# Altium PCB eink_r1.PcbDoc
Units mil, origin at the board's own origin, x right, y up, seen from the top; angles counter-clockwise.
Board outline 1896 x 1576.33 mil, 2 copper layers (Top Layer, Bottom Layer); 38 components, 24 nets, 136 pads, 126 vias.
Unrouted connection lines stored in the file: 2.
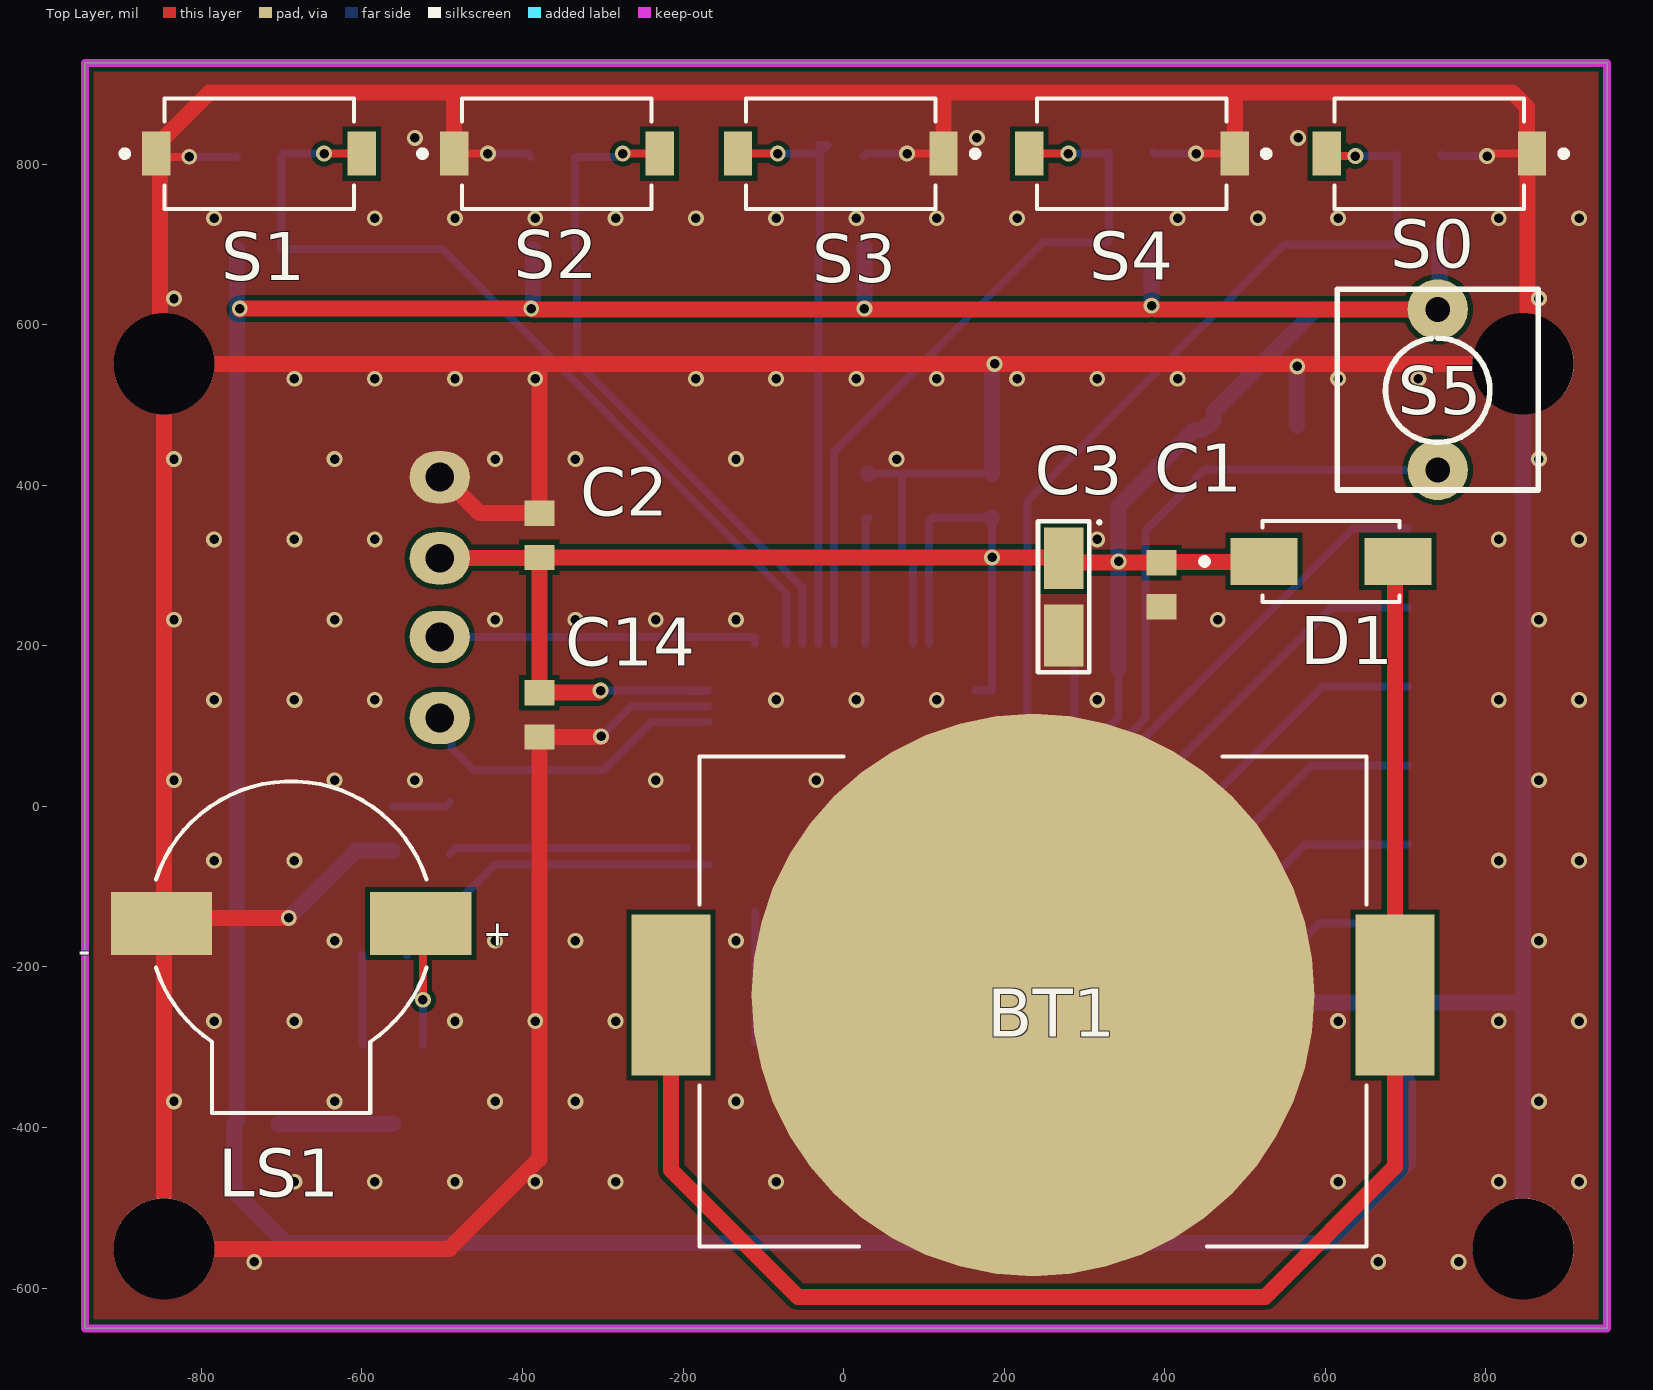
[diagram p0: Top Layer view]
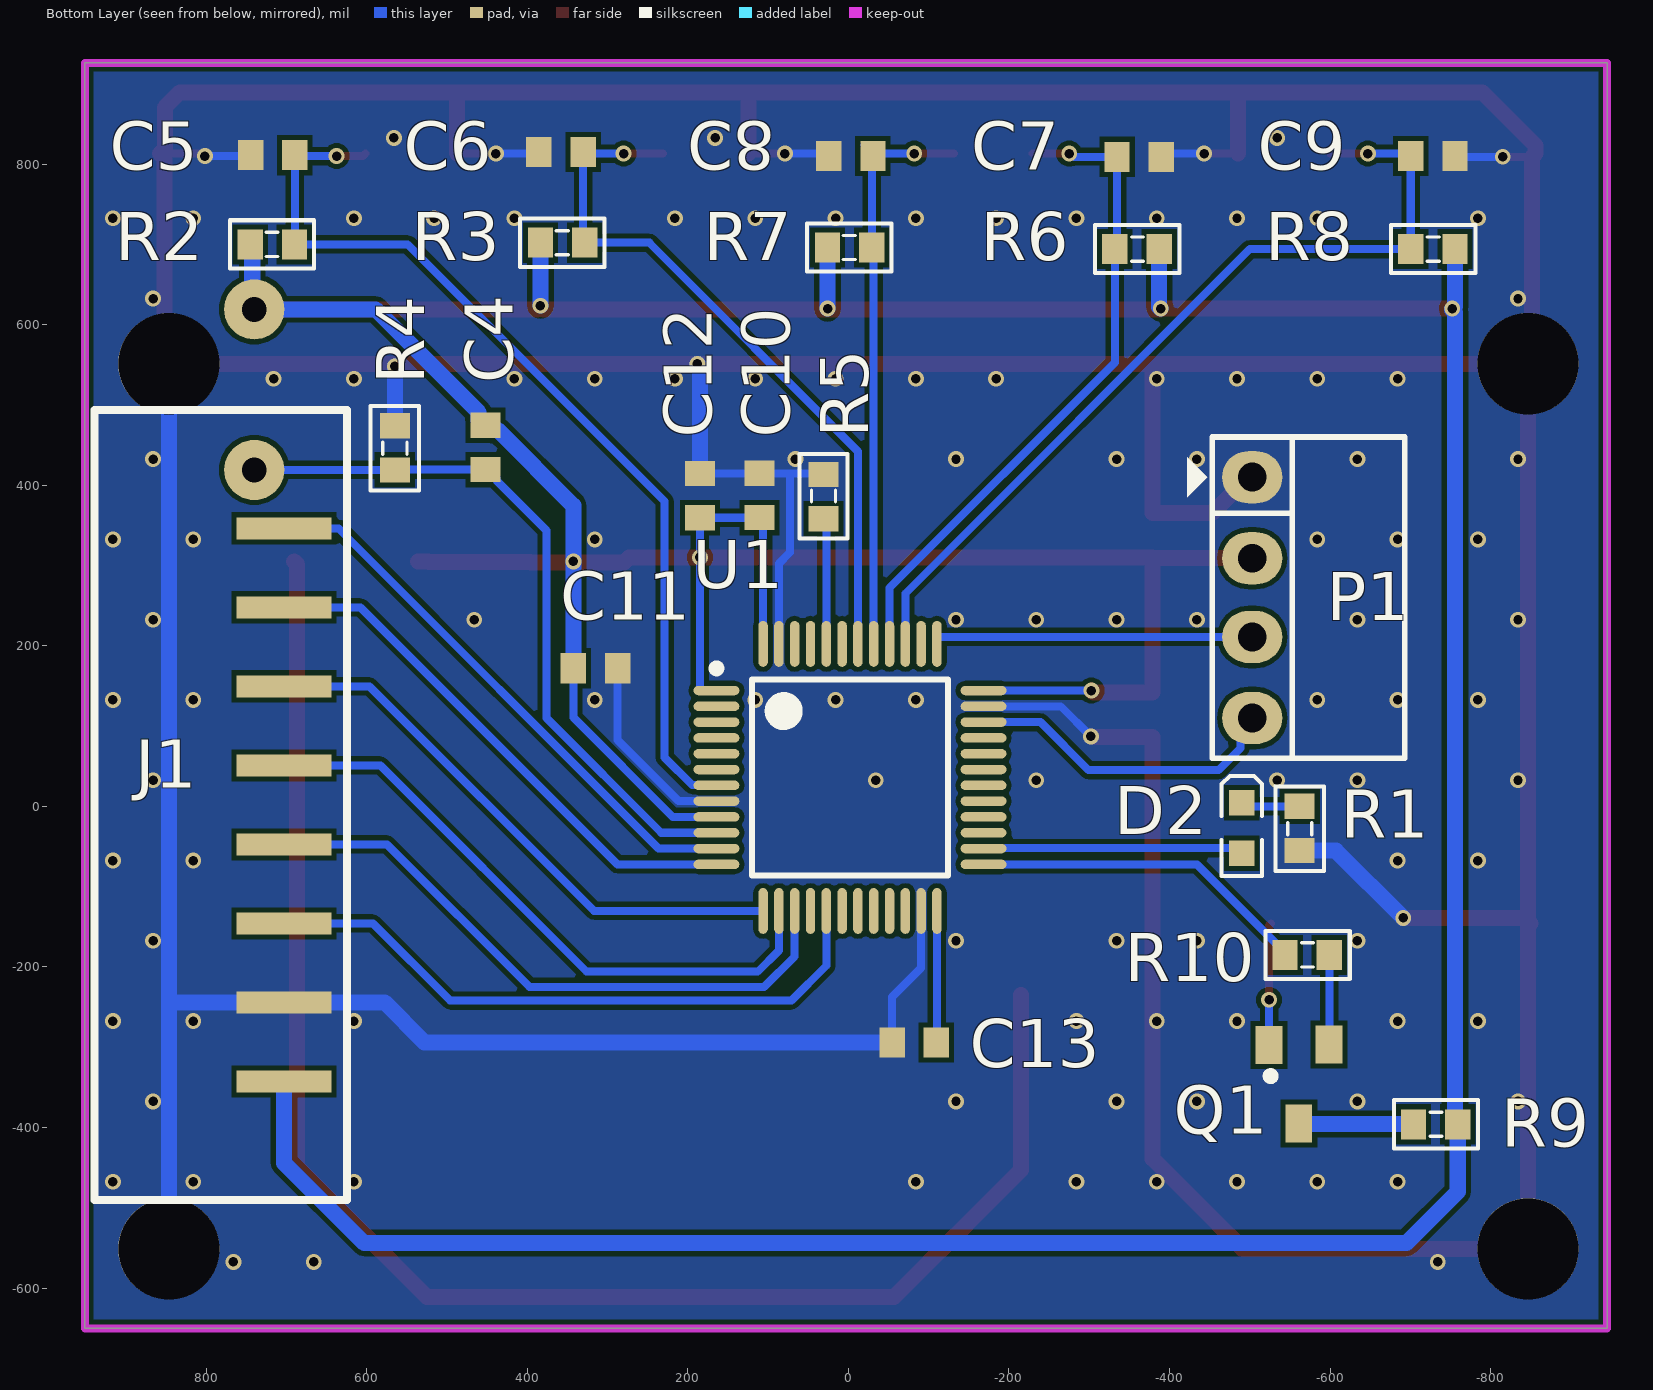
[diagram p1: Bottom Layer view, seen from below]
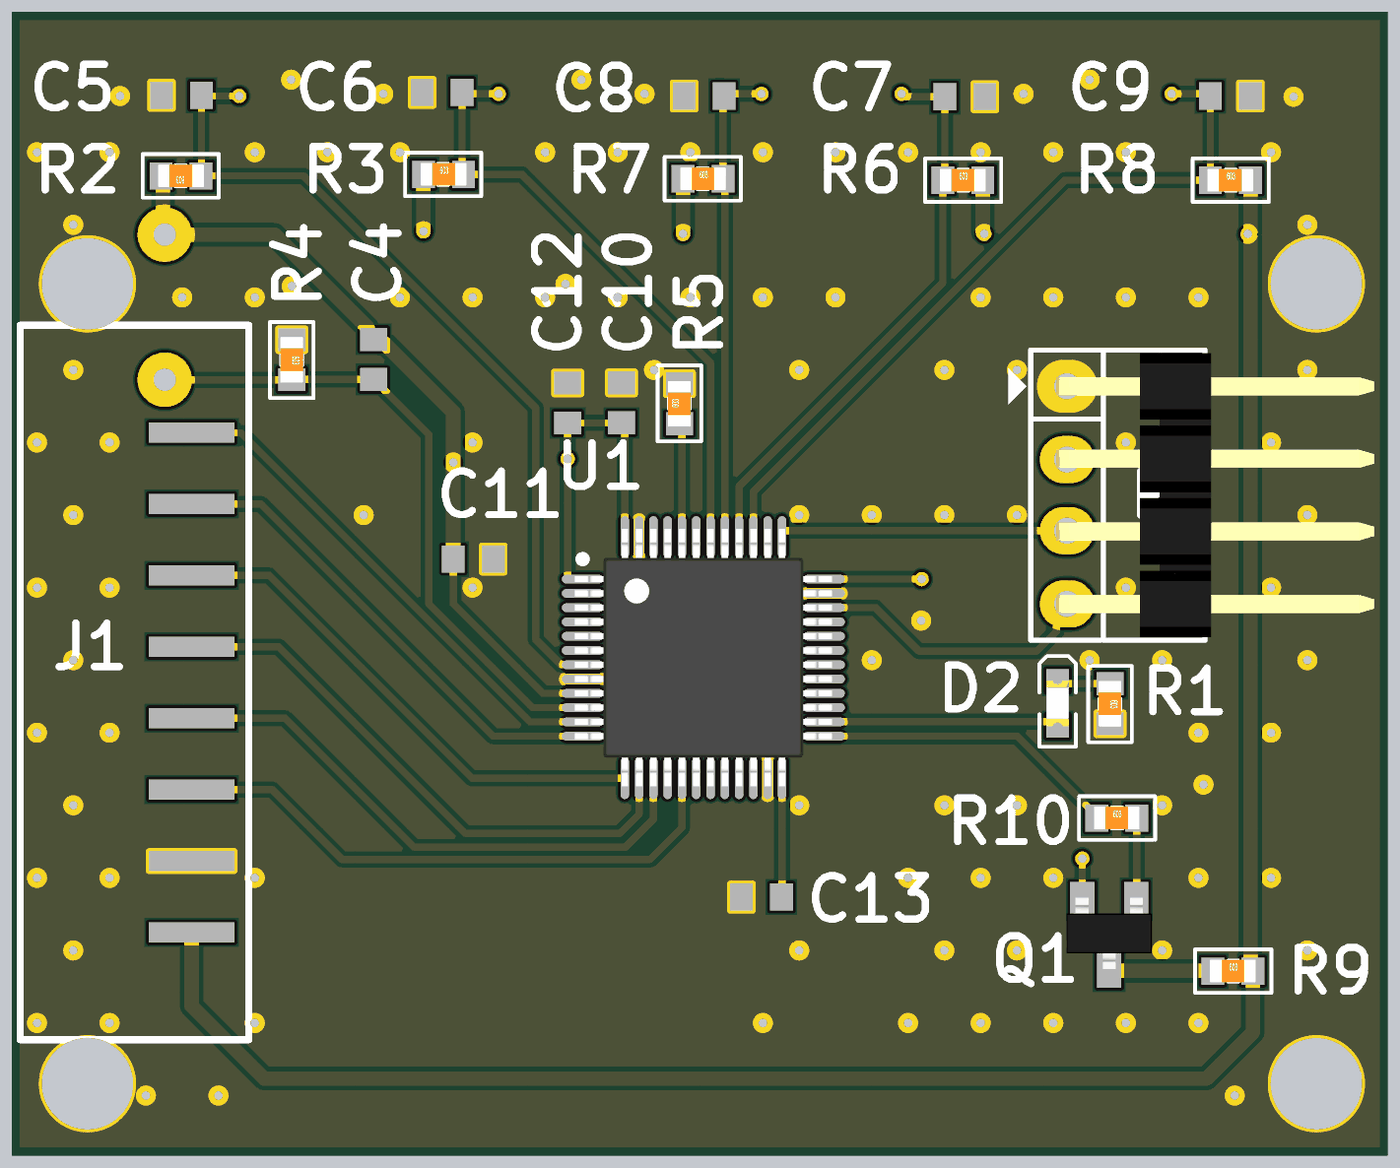
[diagram p2: 3D render of the assembled board from below, using the file's embedded part models]

## Layer stack, top to bottom
Top Solder: solder mask 0.4, Solder Resist, Dk 3.5
Top Layer: signal copper 1.4
Dielectric 1: dielectric 12.6, FR-4, Dk 4.8
Bottom Layer: signal copper 1.4
Bottom Solder: solder mask 0.4, Solder Resist, Dk 3.5

## Board outline
-945,-650.33 -945,926 951,926 951,-650.33

## Design rules (kind name [scope] priority, off if disabled: settings)
Clearance [All] p1: gap=6 ignorepadtopadclearanceinfootprint=FALSE except(0: Arc-Hole Track-Hole SMDPad-Hole THPad-Hole Via-Hole Fill-Hole Poly-Hole Region-Hole Text-Hole)
PlaneConnect [All] p1: planeconnectstyle=Direct reliefexpansion=20 reliefentries=4 reliefconductorwidth=10 reliefairgap=10
PolygonConnect [All] p1: connectstyle=Direct reliefconductorwidth=10 reliefentries=4 polygonreliefangle="90 Angle" airgapwidth=10
RoutingVias [All] p1: holewidth=11.81 width=19.68 viastyle="Through Hole" minholewidth=11.81 minwidth=19.68 maxholewidth=11.81 maxwidth=19.68
SolderMaskExpansion [All] p1: expansion=4 istentingtop=FALSE
Width [All] p1: maxlimit=30 minlimit=10 preferedwidth=20
29 further rules are at their usual default settings.

## Classes and differential pairs
component class eink_r1: BT1 C1 C2 C3 C4 C5 C6 C7 C8 C9 C10 C11 C12 C13 D1 D2 J1 K1 LS1 P1 Q1 R1 R2 R3 R4 R5 R6 R7 R8 R9 R10 S0 S2 S4 S5 U1

## Components (designator, comment, footprint, x,y, rotation, side; value= is the part's Value field where it differs from the comment)
BT1 "BAT-HLD-001" BAT_BAT-HLD-001 236,-235 r0 top
C1 "Cap Non-Pol SMD" CAP-SM-0603 396,276 r90 top value=104
C2 "Cap Non-Pol SMD" CAP-SM-0603 -379,337.56 r270 top value=104
C3 "Tantalum Capacitor" CAPMP3216X18N 274,261 r270 top value=1uF
C4 "Cap Non-Pol SMD" CAP-SM-0603 452,447 r90 bottom value=105
C5 "Cap Non-Pol SMD" CAP-SM-0603 717,811 r180 bottom value=105
C6 "Cap Non-Pol SMD" CAP-SM-0603 358,815 r180 bottom value=105
C7 "Cap Non-Pol SMD" CAP-SM-0603 -362.19,809 r0 bottom value=105
C8 "Cap Non-Pol SMD" CAP-SM-0603 -3,810 r180 bottom value=105
C9 "Cap Non-Pol SMD" CAP-SM-0603 -728,810 r0 bottom value=105
C10 "Cap Non-Pol SMD" CAP-SM-0603 110.68,387.19 r270 bottom value=104
C11 "Cap Non-Pol SMD" CAP-SM-0603 315,172 r0 bottom value=104
C12 "Cap Non-Pol SMD" CAP-SM-0603 185,387 r270 bottom value=104
C13 "Cap Non-Pol SMD" CAP-SM-0603 -82,-294 r180 bottom value=104
C14 "Cap Non-Pol SMD" CAP-SM-0603 -379,114 r90 top value=104
D1 "SS14" DIOM4325X250N 607,305 r0 top
D2 "LED SMD" LED_0603_Blue -490,-27 r90 bottom
J1 "Header" PCBComponent_1 703,1.79 r270 bottom
LS1 "CMT-0926-86-SMT-TR" XDCR_CMT-0926-86-SMT-TR -688,-146 r180 top
P1 "Header 4H" JP4H -503,410 r270 bottom
Q1 "C1815" SOT23B -561,-346 r0 bottom
R1 "RESISTOR SMD" RES-SM-0603 -562.13,-0.5 r270 bottom value=560
R2 "RESISTOR SMD" RES-SM-0603 690.56,700 r0 bottom value=10K
R3 "RESISTOR SMD" RES-SM-0603 329,702 r0 bottom value=10K
R4 "RESISTOR SMD" RES-SM-0603 565,473.56 r270 bottom value=10K
R5 "RESISTOR SMD" RES-SM-0603 31,358.88 r90 bottom value=10K
R6 "RESISTOR SMD" RES-SM-0603 -332.44,694 r180 bottom value=10K
R7 "RESISTOR SMD" RES-SM-0603 -28.56,696 r0 bottom value=10K
R8 "RESISTOR SMD" RES-SM-0603 -701,694 r180 bottom value=10K
R9 "RESISTOR SMD" RES-SM-0603 -704.44,-396 r180 bottom value=100
R10 "RESISTOR SMD" RES-SM-0603 -544.44,-185 r180 bottom value=1K
S0 "PTS636_SM43J_SMTR_LFS" SW_PTS636_SM43J_SMTR_LFS 729.5,813 r180 top (schematic designator S2)
S1 "PTS636_SM43J_SMTR_LFS" SW_PTS636_SM43J_SMTR_LFS -727.95,813 r0 top (schematic designator S6)
S2 "PTS636_SM43J_SMTR_LFS" SW_PTS636_SM43J_SMTR_LFS -357.21,813 r0 top (schematic designator S4)
S3 "PTS636_SM43J_SMTR_LFS" SW_PTS636_SM43J_SMTR_LFS -3.54,813 r180 top (schematic designator S5)
S4 "PTS636_SM43J_SMTR_LFS" SW_PTS636_SM43J_SMTR_LFS 359,813 r180 top (schematic designator S3)
S5 "Tact SW - 2Pin" SW2 740,419 r90 top (schematic designator S1)
U1 "STM32F103C8T6" TSQFP50P900X900X160-48N -2,36 r180 bottom

## Footprints (in the part's own frame and the unit in brackets; to place one, negate y for a bottom-side part, rotate by r counter-clockwise, add the part's x,y. Pads: shape width x height; smd on the part's side, far side on the other; paste and mask are expansions set on the pad)
BAT_BAT-HLD-001 [mm]
  round 17.8 smd paste-10: N1(0,0)
  rect 2.5x5.1 smd: P1(-11.45,0) P2(11.45,0)
  silkscreen extent -10.55,-7.95 10.55,7.55
CAP-SM-0603 [mm] "SMD Ceramic Capacitor Size 0603"
  rect 0.8x0.95 smd: 1(-0.7,0) 2(0.7,0)
  body extent -0.85,-0.45 0.85,0.45, height 0.6
CAPMP3216X18N [mm] "Molded Capacitor, 2-Leads, Body 3.20x1.60mm, IPC Medium Density"
  rect 1.95x1.25 smd: 1(-1.225,0) 2(1.225,0)
  silkscreen extent -2.41,-0.81 2.39,1.18, body extent -1.92,-0.9 1.92,0.9, height 1.8
DIOM4325X250N [mm]
  rect 2.12x1.5 smd: A(2.115,0) C(-2.115,0)
  silkscreen extent -4.1,-1.28 2.16,1.28
JP4H [mil]
  oval 65x75 hole 36: 1(0,0) 2(101,0) 3(199,0) 4(300,0)
  silkscreen extent -50,-81 350,190, body extent -46,-15 346,424, height 99
LED_0603_Blue [mm] "Chip LED, 2-Leads, Body 1.6x0.8mm, IPC Medium Density"
  rect 0.8x0.8 smd: 1(-0.8,0) 2(0.8,0)
  silkscreen extent -1.52,-0.64 1.65,0.64, body extent -0.8,-0.4 0.8,0.4, height 0.7
PCBComponent_1 [mm]
  rect 0.7x3 smd: 1(-8.75,0) 2(-6.25,0) 3(-3.75,0) 4(-1.25,0) 5(1.25,0) 6(3.75,0) 7(6.25,0) 8(8.75,0)
  silkscreen extent -12.5,-6 12.5,2
RES-SM-0603 [mm]
  rect 0.8x0.95 smd: 1(-0.014,0) 2(1.386,0)
  silkscreen extent -0.64,-0.76 2.03,0.76, body extent -0.11,-0.4 1.49,0.4, height 0.3
SOT23B [mm] "SOT 23B"
  rect 0.85x1.2 smd: 1(0.94,-1.245) 2(0,1.25) 3(-0.95,-1.25)
  silkscreen extent 0.77,-0.38 1.02,-0.13, body extent -1.5,-1.3 1.5,1.2, height 1.06
SW2 [mil] "SW button 2pin, 250x 250 mil"
  round 75 hole 31: 1(0,0) 2(200,0)
  silkscreen extent -25,-125 225,125
SW_PTS636_SM43J_SMTR_LFS [mm]
  rect 0.9x1.4 smd: 1(-3.25,0) 2(3.25,0)
  silkscreen extent -4.35,-1.75 3,1.75
TSQFP50P900X900X160-48N [mm] "TSQFP, 48-Leads, Body 7.00x7.00mm, Pitch 0.50mm, IPC Medium Density"
  oval 1.45x0.3 smd: 1(-4.225,2.75) 2(-4.225,2.25) 3(-4.225,1.75) 4(-4.225,1.25) 5(-4.225,0.75) 6(-4.225,0.25) 7(-4.225,-0.25) 8(-4.225,-0.75) 9(-4.225,-1.25) 10(-4.225,-1.75) 11(-4.225,-2.25) 12(-4.225,-2.75) 25(4.225,-2.75) 26(4.225,-2.25) 27(4.225,-1.75) 28(4.225,-1.25) 29(4.225,-0.75) 30(4.225,-0.25) 31(4.225,0.25) 32(4.225,0.75) 33(4.225,1.25) 34(4.225,1.75) 35(4.225,2.25) 36(4.225,2.75)
  oval 0.3x1.45 smd: 13(-2.75,-4.225) 14(-2.25,-4.225) 15(-1.75,-4.225) 16(-1.25,-4.225) 17(-0.75,-4.225) 18(-0.25,-4.225) 19(0.25,-4.225) 20(0.75,-4.225) 21(1.25,-4.225) 22(1.75,-4.225) 23(2.25,-4.225) 24(2.75,-4.225) 37(2.75,4.225) 38(2.25,4.225) 39(1.75,4.225) 40(1.25,4.225) 41(0.75,4.225) 42(0.25,4.225) 43(-0.25,4.225) 44(-0.75,4.225) 45(-1.25,4.225) 46(-1.75,4.225) 47(-2.25,4.225) 48(-2.75,4.225)
  silkscreen extent -4.35,-3.1 3.1,3.57, body extent -4.5,-4.5 4.5,4.5, height 1.6
XDCR_CMT-0926-86-SMT-TR [mm]
  rect 3.2x2 smd: N(4.1,0) P(-4.1,0)
  silkscreen extent -4.28,-4.5 4.28,6

## Part data
BT1: "Battery Retainer Coin, 20.0mm 1 Cell SMD (SMT) Tab", Package=None, Availability=Unavailable, MP=BAT-HLD-001, Price=None
C1 C2 C4 C5 C6 C7 C8 C9 C10 C11 C12 C13 C14: "Capacitor"
D1 LS1: Package=None, Availability=Unavailable, Price=None
  D1: MP=SS14
  LS1: MP=CMT-0926-86-SMT-TR
D2: "LED"
J1: "XH 2.54mm PCB Header 8 Pin SMD Horizontal"
P1: "Header, 4-Pin, Right Angle", LatestRevisionDate=17-Jul-2002, LatestRevisionNote="Re-released for DXP Platform.", Publisher="Altium Limited"
Q1: "NPN Bipolar Transistor"
R1 R2 R3 R4 R5 R6 R7 R8 R9 R10: "Resistor"
S0 S1 S2 S3 S4: "Tactile Switch SPST-NO Top Actuated Surface Mount", Package=None, Availability=Unavailable, MP=PTS636_SM43J_SMTR_LFS, Price=None
S5: "Switch button 2 pin"
U1: Manufacturer=ST, ComponentLink1Description="Supplier 1 Link"

## Free pads (board coordinates)
  round 125.98 hole 125.98: 1(-846.46,-551.18) 1(-846.46,551.18) 1(846.46,-551.18) 1(846.46,551.18)

## Via types
v1: diameter 19.68, hole 11.81, Top Layer to Bottom Layer, 126 vias

## Nets (pads, with @x,y where several pads share a name; then routed paths per layer and width w, separated by ;. In a path a pad name is that pad's centre, name@x,y a point inside that pad or via, vN(x,y) a via of type N, cw(c..) or ccw(c..) an arc to the next point about the centre after c; other vN are vias at no path point)
3V3: C1.2 C2.2 C3.1 C4.2 C10.2 C11.2 C12.2 C13.2 C14.2 D1.C J1.8 P1.2 R2.2 R3.2 R6.2 R7.2 R8.2 R9.2 S5.2 U1.1 U1.9 U1.24 U1.36 U1.48 | length 7704
  Top Layer w10: C14.2 C14.2@-376.29,144.27
  Top Layer w20: v1@-752,619 -751,620 v1(-389,620) -388,619 379,619 v1(383.56,623.56) 388.12,619 S5.2 S5.2@743,616 ; P1.2 -502.5,309.5 -379.5,309.5 C2.2 ; v1(-302.73,144.27) -305.44,141.56 C14.2 C2.2 ; D1.C@535.94,305 D1.C 523.01,304.28 396.72,304.28 C1.2 279.67,303.56 C3.1 273.23,310 v1(185,310) C2.2
  Bottom Layer w10: v1(-302.73,144.27) U1.36 ; U1.36@-192.08,143.65 -191.81,143.92 -169.22,143.92 U1.36@-168.95,143.65 ; U1.24 -110.27,-293.29 C13.2 ; U1.48 106.27,355.02 C10.2@110.78,359.54 ; C10.2 C10.2@110.78,359.54 ; U1.9 218.79,-13.21 342.56,110.56 C11.2 ; U1.1 184.16,144.27 185,145.1 v1(185,310) C12.2 110.88,359.44 C10.2@110.78,359.54
  Bottom Layer w20: R8.2 -755.56,622.56 -752,619 -755.56,615.44 -755.56,-392.56 R9.2 -759,-480 -695,-544 603,-544 703,-444 J1.8 ; v1(-389,620) -387,622 R6.2 ; v1(26,620) R7.2 ; C12.2@184.9,359.54 C12.2 ; C11.2 v1(342.56,305) 342.56,374.56 436.81,468.81 446.25,468.81 C4.2 454.95,474.56 460.7,480.31 460.7,490.7 589,619 S5.2 742.56,621.56 742.56,697.44 R2.2 ; v1(383.56,623.56) R3.2
  other v1: -752,620
BUSY: J1.1 U1.11 | length 703.9
  Bottom Layer w10: U1.11 236.42,-52.58 634.8,345.8 702.53,345.8 J1.1
BUTTON1: C9.2 R8.1 S1.2 U1.39 | length 1087.5
  Top Layer w10: v1(-647,813) S1.2
  Bottom Layer w10: v1(-647,813) -697.44,813 C9.2 R8.1 -500,694 -70.9,264.9 U1.39
BUTTON2: C7.2 R6.1 S2.2 U1.40 | length 833.3
  Top Layer w10: v1(-275,813) S2.2
  Bottom Layer w10: v1@-279.85,813 v1@-277.62,813 ; v1(-275,813) v1@-277.62,813 ; U1.40 -51.21,272.21 -331.88,552.88 R6.1 -334.63,696.75 C7.2 -281.62,809 v1@-277.62,813
BUTTON3: C8.2 R7.1 S3.2 U1.41 | length 739.9
  Top Layer w10: S3.2 v1(-82,813)
  Bottom Layer w10: v1(-82,813) -33.56,813 C8.2 -29.12,808.56 R7.1 -31.53,693.59 U1.41 ; C8.2@-30.56,823.7 -19.81,823.7 -29.43,814.09 C8.2@-29.43,810
BUTTON4: C6.2 R3.1 S4.2 U1.42 | length 899
  Top Layer w10: S4.2 v1(280,813)
  Bottom Layer w10: U1.42 -11.84,442.16 248,702 R3.1 ; v1(280,813) 328.44,813 C6.2 R3.1@330.44,704
BUZZER: R10.1 U1.25 | length 424
  Bottom Layer w10: R10.1 -543.88,-182.05 -434.1,-72.27 U1.25
DC: J1.3 U1.13 | length 712.6
  Bottom Layer w10: U1.13 316.66,-130.34 596.43,149.43 J1.3
GND: BT1.N1 C1.1 C2.1 C3.2 C5.1 C6.1 C7.1 C8.1 C9.1 C10.1 C11.1 C12.1 C13.1 C14.1 J1.7 LS1.N P1.1 pad.1 R1.2 R4.1 R5.2 S0.1 S1.1 S2.1 S3.1 S4.1 U1.8 U1.23 U1.35 U1.47 | length 10826.1
  Top Layer w10: S1.1@-851.91,809 v1(-815,809) ; S2.1 v1(-443,813) ; C14.1 C14.1@-378.44,87 ; v1(79,813) S3.1 ; v1(439,813) S4.1 ; v1@809,813 S0.1
  Top Layer w20: v1(-691,-139) -842.42,-139 LS1.N@-846.46,-143.04 ; P1.1 -498,410 -453.12,365.12 C2.1 -379,551 ; S2.1 -485.16,887.16 -487.23,889.23 ; v1(-302,87) -302.56,86.44 C14.1 -379,-439 -491.18,-551.18 -846.46,-551.18 -846.46,-148.96 LS1.N LS1.N@-846.46,-143.04 ; S3.1 124.42,885.41 ; S4.1@487.41,813.45 487.41,885.41 ; LS1.N@-846.46,-143.04 pad.1@-846.46,551.18 ; pad.1@-846.46,551.18 -846.28,551 -379,551 ; pad.1@-846.46,551.18 -851.18,555.91 -851.18,808.28 -851.91,809 S1.1 -855.91,822.84 -789.52,889.23 -487.23,889.23 ; -487.23,889.23 832.77,889.23 851.44,870.56 851.44,819.01 S0.1 851.95,807.5 851.95,556.68 846.46,551.18 568.18,551.18 v1(565,548) 562,551 -379,551
  Top Layer w30: pad.1@-846.46,-563 pad.1@-846.46,-551.18
  Bottom Layer w10: v1(-815,809) -756.56,809 C9.1 ; v1(-443,813) -393.75,813 C7.1 ; v1(-302,87) -264.42,124.58 U1.35 ; U1.23 -90.58,-201.42 -54.44,-237.56 C13.1 ; C8.1 27.56,813 v1(79,813) ; R5.2 32.12,414.56 C12.1 ; 73,412 73,316 86.58,302.42 U1.47 ; U1.8 211.47,6.47 287.44,82.44 C11.1 ; C6.1 387.56,813 v1(439,813) ; C5.1 745.56,810 v1(801.56,810)
  Bottom Layer w20: v1(-691,-139) -607.06,-55.06 R1.2 ; C13.1 528,-294 577.72,-244.28 J1.7 844.73,-244.28 846.46,-246 ; R5.2@31,414 R5.2@31.28,414.28 ; C12.1 185,548 v1(188,551) ; R4.1 v1(565,548) ; pad.1@846.46,-551.18 846.46,-246 ; pad.1@846.46,551.18 846.46,-246
  other v1: -734,-567.5 666,-567.5 766,-567.5 -684,-467.5 -584,-467.5 -484,-467.5 -384,-467.5 -284,-467.5 -84,-467.5 616,-467.5 816,-467.5 916,-467.5 -834,-367.5 -634,-367.5 -434,-367.5 -334,-367.5 -134,-367.5 866,-367.5 -784,-267.5 -684,-267.5 -484,-267.5 -384,-267.5 -284,-267.5 616,-267.5 816,-267.5 916,-267.5 -634,-167.5 -434,-167.5 -334,-167.5 -134,-167.5 866,-167.5 -784,-67.5 -684,-67.5 816,-67.5 916,-67.5 -834,32.5 -634,32.5 -534,32.5 -234,32.5 -34,32.5 866,32.5 -784,132.5 -684,132.5 -584,132.5 -84,132.5 16,132.5 116,132.5 316,132.5 816,132.5 916,132.5 -834,232.5 -634,232.5 -434,232.5 -334,232.5 -234,232.5 -134,232.5 466,232.5 866,232.5 -784,332.5 -684,332.5 -584,332.5 316,332.5 816,332.5 916,332.5 -834,432.5 -634,432.5 -434,432.5 -334,432.5 -134,432.5 66,432.5 866,432.5 -684,532.5 -584,532.5 -484,532.5 -384,532.5 -184,532.5 -84,532.5 16,532.5 116,532.5 216,532.5 316,532.5 416,532.5 616,532.5 716,532.5 -834,632.5 866,632.5 -784,732.5 -584,732.5 -484,732.5 -384,732.5 -284,732.5 -184,732.5 -84,732.5 16,732.5 116,732.5 216,732.5 416,732.5 516,732.5 616,732.5 816,732.5 916,732.5 -534,832.5 166,832.5 566,832.5
LED: D2.1 U1.26 | length 296.5
  Bottom Layer w10: D2.1 -483.5,-52 U1.26@-196.17,-52
NetBT1_P1: BT1.P1 BT1.P2 D1.A | length 2007.8
  Top Layer w20: BT1.P1 -214.79,-453.21 -57,-611 525,-611 686.79,-449.21 BT1.P2 686.79,301.52 D1.A
NetD2_2: D2.2 R1.1 | length 74
  Bottom Layer w10: R1.1 -494.44,0.06 D2.2
NetLS1_P: LS1.P Q1.1 | length 152.1
  Top Layer w10: LS1.P -524,-148.58 v1(-524,-241)
  Bottom Layer w10: Q1.1 v1(-524,-241)
NetQ1_2: Q1.2 R9.1 | length 143.7
  Bottom Layer w10: R9.1 R9.1@-703.54,-396.35
  Bottom Layer w20: R9.1 -703.49,-395.61 -561.39,-395.61 Q1.2
NetQ1_3: Q1.3 R10.2 | length 112
  Bottom Layer w10: R10.2 -599,-296.19 Q1.3
NetR5_1: R5.1 U1.44 | length 161.5
  Bottom Layer w10: U1.44 R5.1@27.53,355.41 ; R5.1@27.53,358.88 R5.1@27.53,355.41 ; R5.1@31,358.88 R5.1@27.53,355.41
RESET: C5.2 R2.1 S0.2 U1.7 | length 1192.4
  Top Layer w10: S0.2 604.55,810 v1(637.56,810)
  Bottom Layer w10: U1.7 164.68,26.5 194.5,26.5 229,61 229,380 549,700 R2.1 689.44,700.56 C5.2 688.44,810 v1(637.56,810)
RST: J1.2 U1.12 | length 671.3
  Bottom Layer w10: U1.12 287.73,-72.27 607.85,247.85 J1.2
SPI_CLK: J1.5 U1.15 | length 782
  Bottom Layer w10: U1.15 66.9,-186.9 105,-225 397,-225 574.57,-47.43 J1.5
SPI_CS: J1.4 U1.14 | length 783.1
  Bottom Layer w10: U1.14 86.58,-179.58 113,-206 326,-206 583,51 J1.4
SPI_MOSI: J1.6 U1.17 | length 801.5
  Bottom Layer w10: U1.17 27.53,-198.53 71,-242 496,-242 592.15,-145.85 J1.6
SWDCLK: P1.3 U1.37 | length 400.9
  Bottom Layer w10: P1.3 -111.1,211 -110.27,210.16 U1.37
SWDIO: P1.4 U1.34 | length 399.9
  Bottom Layer w10: P1.4 -488.41,95.41 -488.41,72.41 -461,45 -299,45 -239.1,104.9 U1.34
WKUP: C4.1 R4.2 S5.1 U1.10 | length 901.3
  Bottom Layer w10: U1.10 233.1,-32.9 376,110 376,343.44 438.3,405.74 438.3,408.69 448.76,419.16 C4.1@451.72,419.16 ; C4.1 564.56,419.44 R4.2 S5.1
pads on no net: U1.2 U1.3 U1.4 U1.5 U1.6 U1.16 U1.18 U1.19 U1.20 U1.21 U1.22 U1.27 U1.28 U1.29 U1.30 U1.31 U1.32 U1.33 U1.38 U1.43 U1.45 U1.46

## Polygon pours and split planes (outlines as drawn)
GND on Top Layer "GND_L01_P000" (solid, remove dead copper, pour order 0): -945,-650.33 -945,926 951,926 951,-650.33
GND on Bottom Layer "GND_L02_P001" (solid, remove dead copper, pour order 1): -945,-650.33 -945,926 951,926 951,-650.33

## Keep-outs
Keep-Out Layer:
  the board outline again, w10

## Text inside footprints (layer, text, board x,y; h text height)
LS1: Top Overlay "+" at -413,-146 h32 r180; Top Overlay "-" at -938,-171 h32 r180; Mechanical 13 "-" at -938,-171 h32 r180; Mechanical 13 "+" at -413,-146 h32 r180